# EAGLE board Ultrasonic1 (EAGLE 9.3.0)
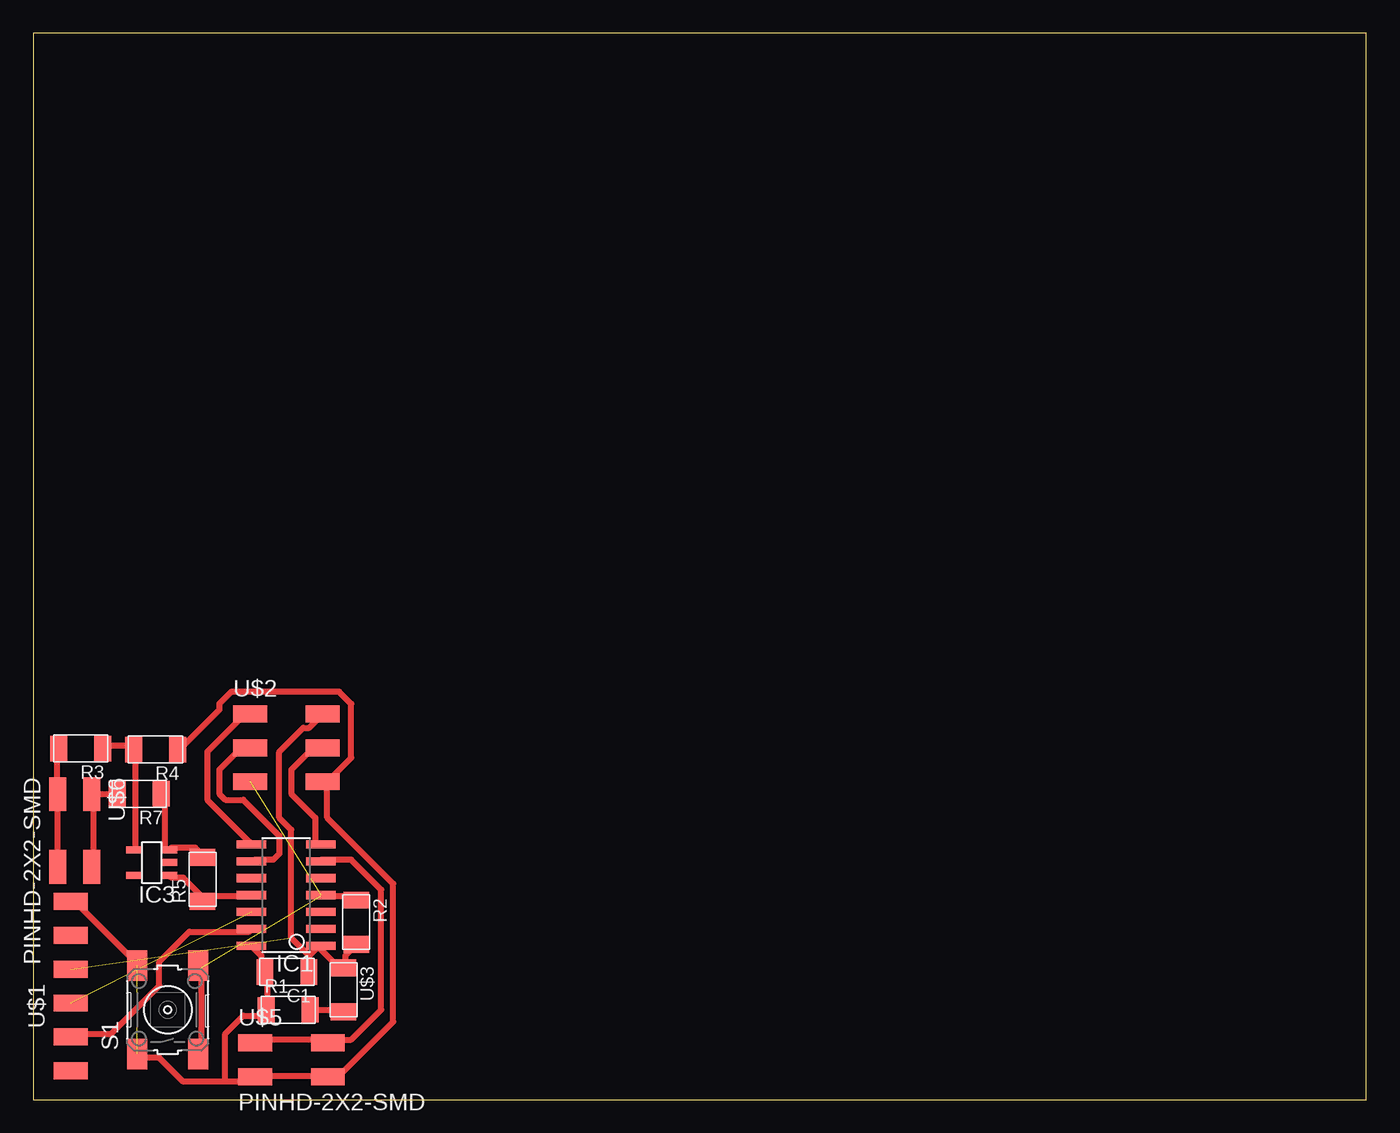
[diagram p0: board, top side]

Size 100 x 80 mm. Coordinates in mm from the lower left corner, seen from the top.
Outline: 0,0 100,0 100,80 0,80 0,0
Copper layers (1*16): Top 0.035mm / dielectric 1.5mm / Bottom 0.035mm
Design rules "default *": minimum track width 0.45mm, minimum drill 0.03215mm, track to track 0.45mm, track to pad 0.45mm, pad to pad 0.45mm, via to via 0.45mm, smd to smd 6mil, copper to edge 40mil, drill to drill 6mil, minimum pad ring 10mil, minimum via ring 8mil, stop-mask expansion 4mil, vias tented up to drill 0mil, thermal gap 10mil

## Footprints (pad centres in the part's own frame; a part is rotated, then mirrored left to right if it is on the bottom)
C1206FAB = smd 1.27 x 1.905: 1 -1.651,0; 2 1.651,0
SOIC14 = smd 0.61 x 2.21: 1 -3.81,-2.603; 2 -2.54,-2.603; 3 -1.27,-2.603; 4 0,-2.603; 5 1.27,-2.603; 6 2.54,-2.603; 7 3.81,-2.603; 8 3.81,2.603; 9 2.54,2.603; 10 1.27,2.603; 11 0,2.603; 12 -1.27,2.603; 13 -2.54,2.603; 14 -3.81,2.603
SOT23-5 = smd 0.533 x 1.194: 1 -0.95,-1.306; 2 0,-1.306; 3 0.95,-1.306; 4 0.95,1.306; 5 -0.95,1.306
R1206FAB = smd 1.27 x 1.905: 1 -1.651,0; 2 1.651,0
6MM_SWITCH = smd 2.286 x 1.524: 1 -3.302,2.286; 2 3.302,2.286; 3 -3.302,-2.286; 4 3.302,-2.286
1X06SMD = smd 2.54 x 1.27: 1 0,6.35; 2 0,3.81; 3 0,1.27; 4 0,-1.27; 5 0,-3.81; 6 0,-6.35
2X03SMD = smd 2.54 x 1.27: 1 -2.54,2.54; 2 2.92,2.54; 3 -2.54,0; 4 2.92,0; 5 -2.54,-2.54; 6 2.92,-2.54
LED1206FAB = smd 1.27 x 1.905: 1 -1.651,0; 2 1.651,0
2X02SMD = smd 2.54 x 1.27: 1 -2.54,1.27; 2 2.92,1.27; 3 -2.54,-1.27; 4 2.92,-1.27

## Placement (x,y rotation side)
C1  1uF  [C1206FAB]  19.02,9.58 180 top
IC1  ATTINY44-SSU  [SOIC14]  18.97,15.34 90 top
IC3  OPAMPSOT23-5  [SOT23-5]  8.89,17.78 90 top
R1  499  [R1206FAB]  19.13,6.73 0 top
R2  10K  [R1206FAB]  24.23,13.31 270 top
R3  10K  [R1206FAB]  3.56,26.34 180 top
R4  10  [R1206FAB]  9.17,26.26 180 top
R5  10  [R1206FAB]  12.7,16.51 90 top
R7  10K  [R1206FAB]  7.95,22.94 180 top
S1  [6MM_SWITCH]  10.08,6.73 90 top
U$1  FTDI-SMD-HEADER  [1X06SMD]  2.79,8.51 0 top
U$2  AVRISPSMD  [2X03SMD]  18.8,26.39 0 top
U$3  LEDFAB1206  [LED1206FAB]  23.27,8.23 270 top
U$5  PINHD-2X2-SMD  [2X02SMD]  19.18,2.97 0 top
U$6  PINHD-2X2-SMD  [2X02SMD]  3.1,20.37 270 top

## Library data of the parts
C1 IC1 IC3 R1-R5 R7 S1 U$1-U$3 U$5 U$6 = fab

## Nets
0: C1.2 IC1.14 R1.1 R4.1 S1.1 S1.2 U$1.1 U$2.6 U$5.3 U$5.4
ANALOG: IC1.11 IC3.1 R5.1
MISO: IC1.8 U$2.1
MOSI: IC1.7 U$2.4
N$1: R1.2 U$3.2
N$3: IC3.3 R5.2 R7.1
N$5: IC1.5
N$6: IC1.3
N$7: IC1.2
N$11: IC3.4 R3.1 R4.2
N$12: IC1.10
PWM: IC1.6 U$5.1 U$5.2
RST: IC1.4 R2.1 S1.3 S1.4 U$2.5
RX: IC1.13 U$1.5
SCK: IC1.9 U$2.3
TRANS1: R7.2 U$6.1 U$6.2
TRANS2: R3.2 U$6.3 U$6.4
TX: IC1.12 U$1.4
V+: IC3.5
V-: IC3.2
VCC: C1.1 IC1.1 R2.2 U$1.3 U$2.2 U$3.1

## Tracks (layer width: path | path; a pad name or v marks a point on that pad's centre or on a via)
0  (1 unrouted)
  Top 0.45: S1.2 7.65,10.35 3.15,14.85 U$1.1 | 22.05,23.85 23.85,25.65 23.85,29.7 22.95,30.6 14.85,30.6 13.95,29.7 13.95,29.25 11.25,26.55 R4.1 | IC1.14 16.65,11.25 17.1,10.8 17.1,9.9 C1.2 17.55,9.45 17.55,6.75 R1.1 17.1,6.3 15.75,6.3 14.4,4.95 14.4,1.35 | 14.4,1.35 16.2,1.35 U$5.3 16.65,1.8 22.05,1.8 U$5.4 22.5,1.35 27,5.85 27,16.2 22.05,21.15 22.05,23.85 | 14.4,1.35 11.25,1.35 9.45,3.15 8.1,3.15 S1.1 | 22.05,23.85 U$2.6
ANALOG
  Top 0.45: IC3.1 10.35,16.65 11.25,16.65 12.6,15.3 R5.1 13.05,15.3 16.2,15.3 IC1.11
MISO
  Top 0.45: IC1.8 16.2,19.35 13.05,22.5 13.05,26.1 16.2,29.25 U$2.1
MOSI
  Top 0.45: IC1.7 21.15,19.35 21.15,21.15 19.35,22.95 19.35,24.75 20.7,26.1 21.6,26.1 U$2.4
N$1
  Top 0.45: U$3.2 22.95,6.75 21.15,6.75 R1.2
N$3
  Top 0.45: R5.2 12.6,18.45 12.15,18.9 10.35,18.9 IC3.3 9.9,18.9 9.9,22.5 R7.1
N$11
  Top 0.45: IC3.4 7.65,18.9 7.65,26.1 R4.2 7.2,26.55 5.4,26.55 R3.1
PWM
  Top 0.45: IC1.6 21.6,18 23.85,18 26.1,15.75 26.1,6.75 23.85,4.5 22.5,4.5 U$5.2 22.05,4.5 16.65,4.5 U$5.1
RST  (2 unrouted)
  Top 0.45: S1.3 12.6,3.6 12.6,9.9 S1.4 | R2.1 23.85,15.3 21.6,15.3 IC1.4
RX
  Top 0.45: IC1.13 16.2,12.6 11.7,12.6 9.45,10.35 9.45,8.55 5.85,4.95 3.15,4.95 U$1.5
SCK
  Top 0.45: IC1.9 16.65,18 18,18 18.45,18.45 18.45,19.8 15.75,22.5 14.4,22.5 13.95,22.95 13.95,24.75 15.3,26.1 16.2,26.1 U$2.3
TRANS1
  Top 0.45: R7.2 5.85,22.95 4.5,22.95 U$6.1 4.5,22.5 4.5,17.55 U$6.2
TRANS2
  Top 0.45: R3.2 1.8,26.1 1.8,22.95 U$6.3 1.8,22.5 1.8,17.55 U$6.4
TX  (1 unrouted)
VCC  (1 unrouted)
  Top 0.45: R2.2 23.85,11.25 23.4,10.8 23.4,9.9 U$3.1 22.95,9.9 21.6,11.25 IC1.1 21.15,11.25 20.7,10.8 | 20.7,10.8 20.7,9.9 C1.1 | 20.7,10.8 19.35,12.15 19.35,20.25 18.45,21.15 18.45,26.1 20.25,27.9 20.7,27.9 21.6,28.8 U$2.2